# Altium PCB MQ-2_PCB.PcbDoc
Units mm, origin at the board's own origin, x right, y up, seen from the top; angles counter-clockwise.
Board outline 21 x 39.8 mm, 2 copper layers (Top Layer, Bottom Layer), stack 1.571 mm thick; 13 components, 8 nets, 39 pads, 5 vias.
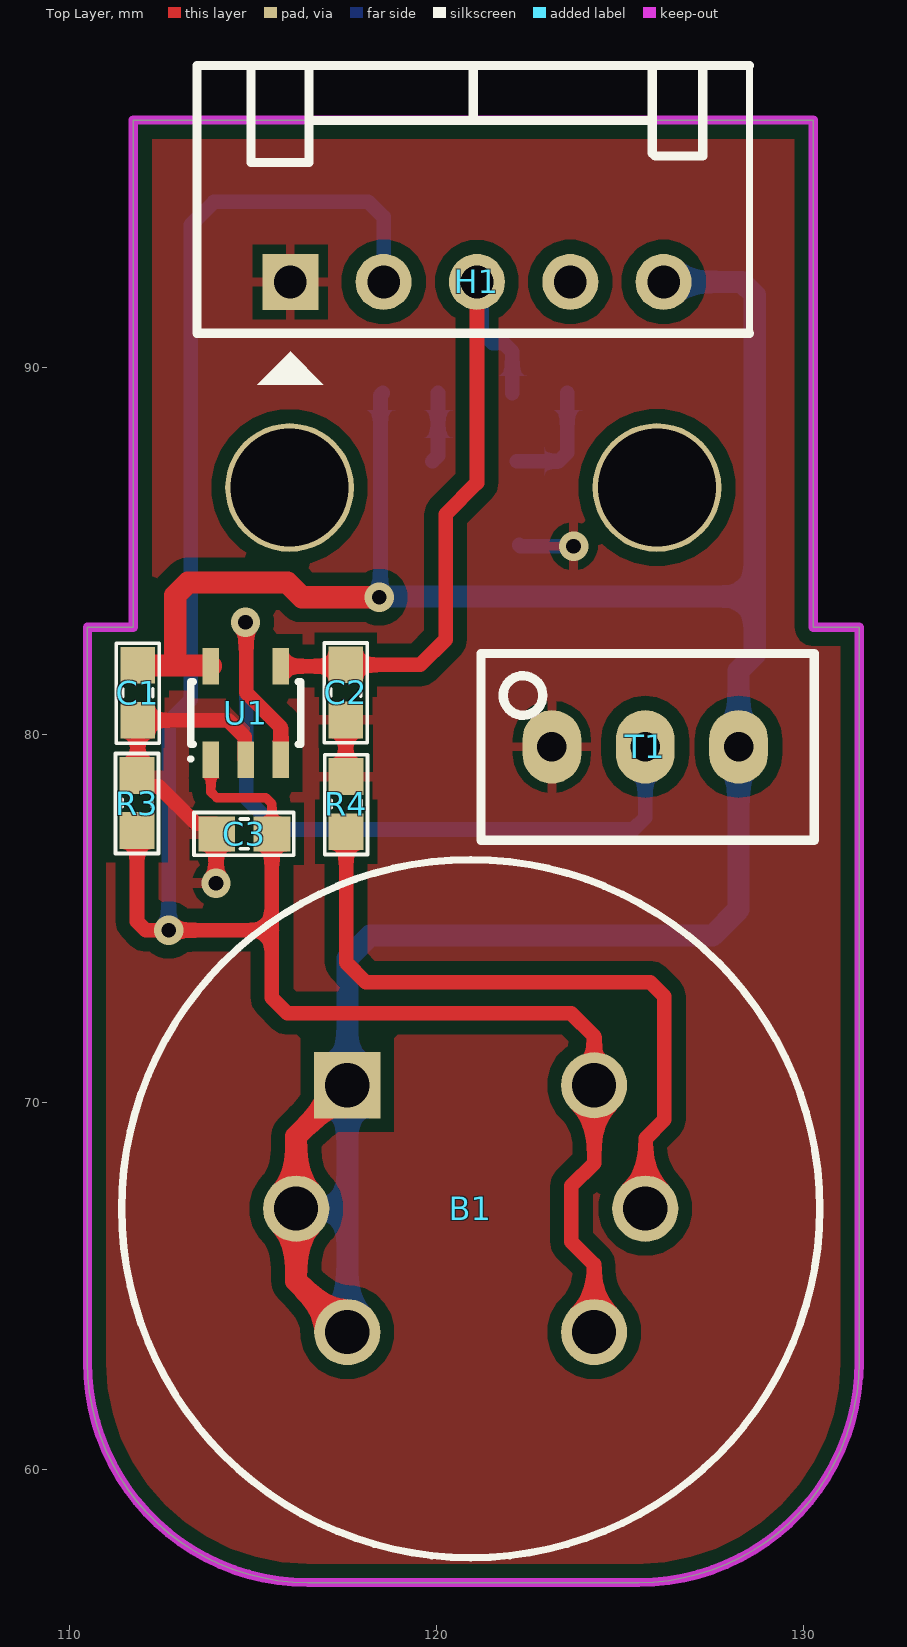
[diagram p0: Top Layer view]
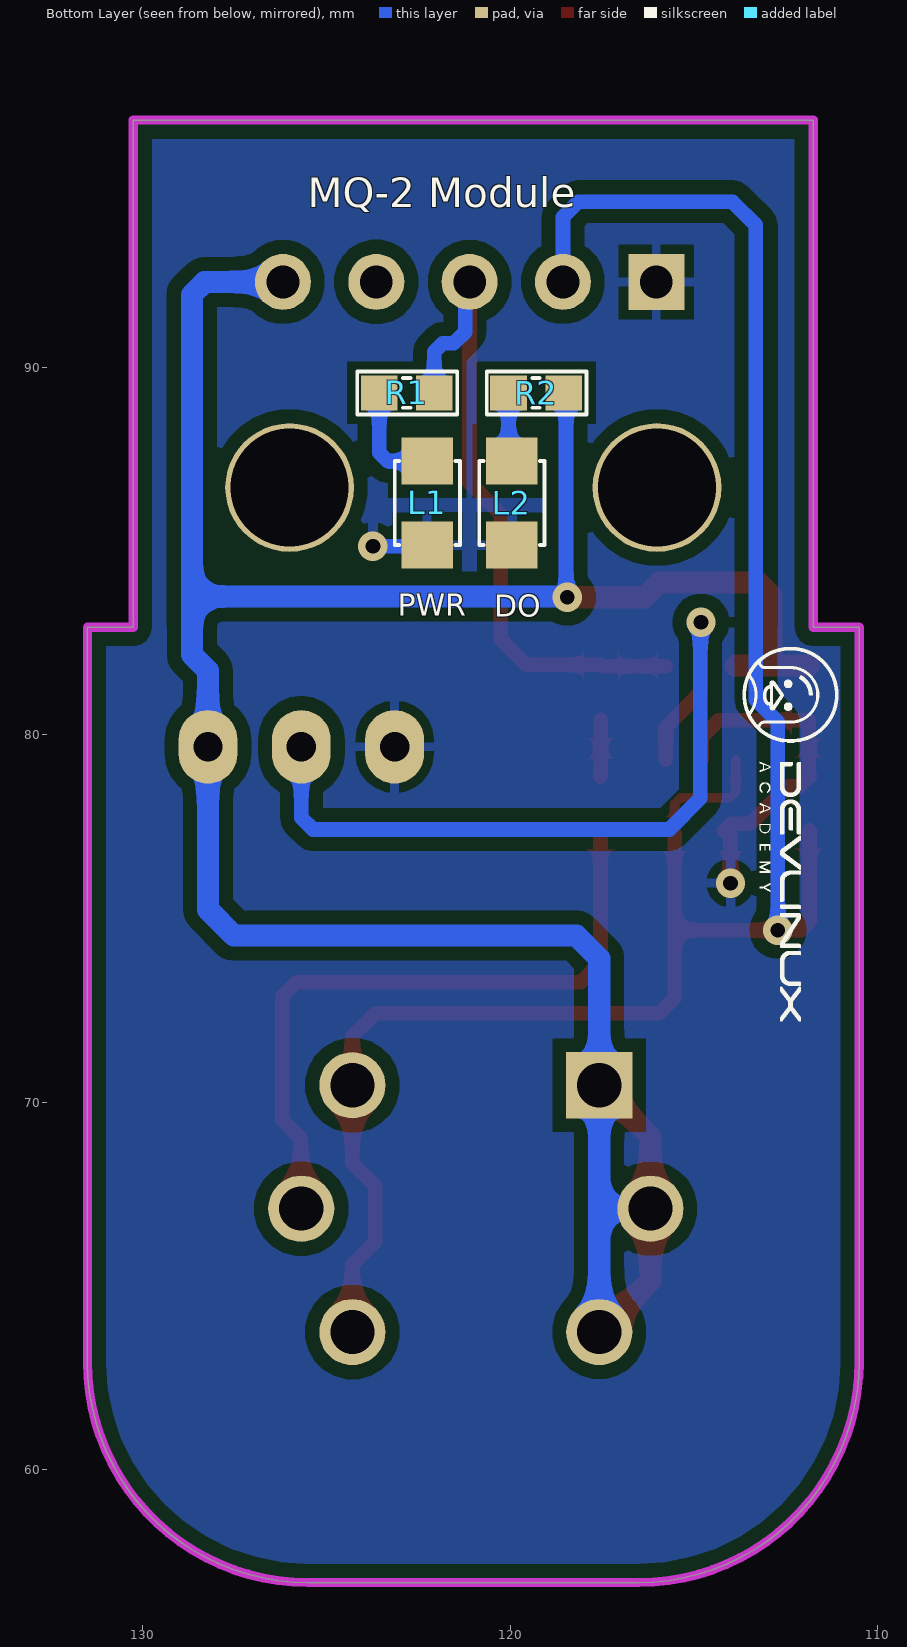
[diagram p1: Bottom Layer view, seen from below]
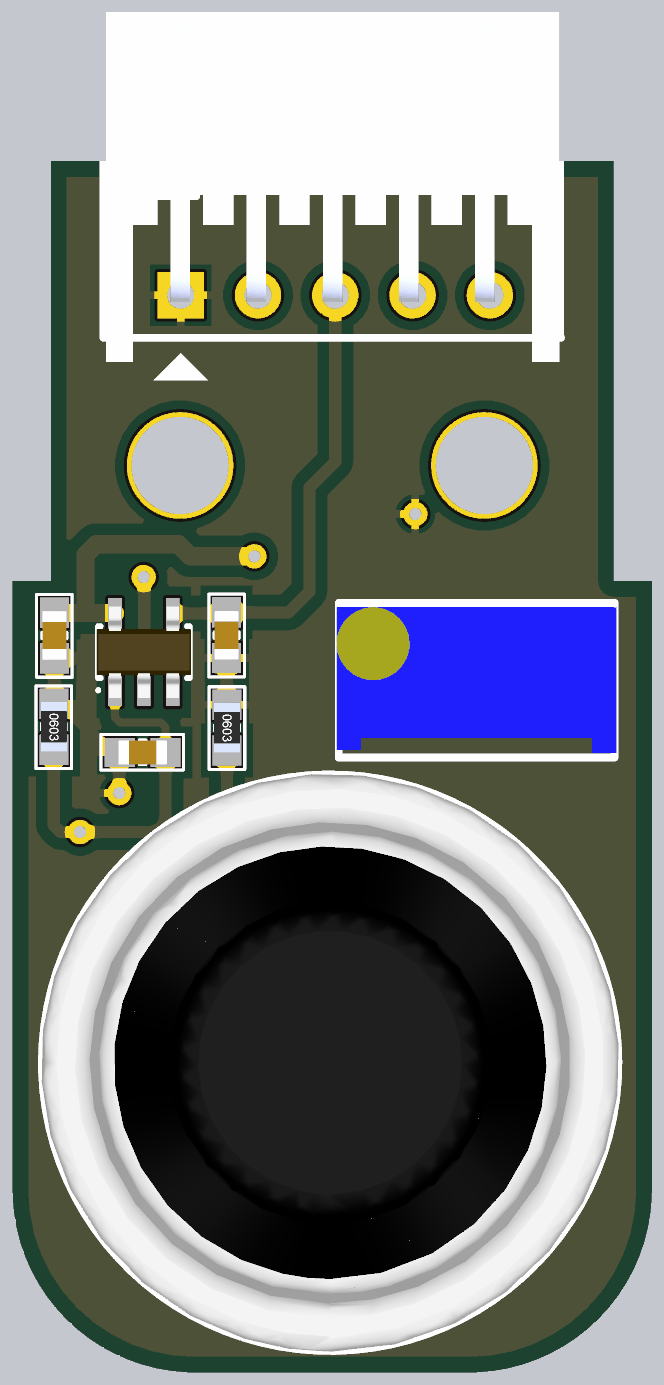
[diagram p2: 3D render of the assembled board from above, using the file's embedded part models]
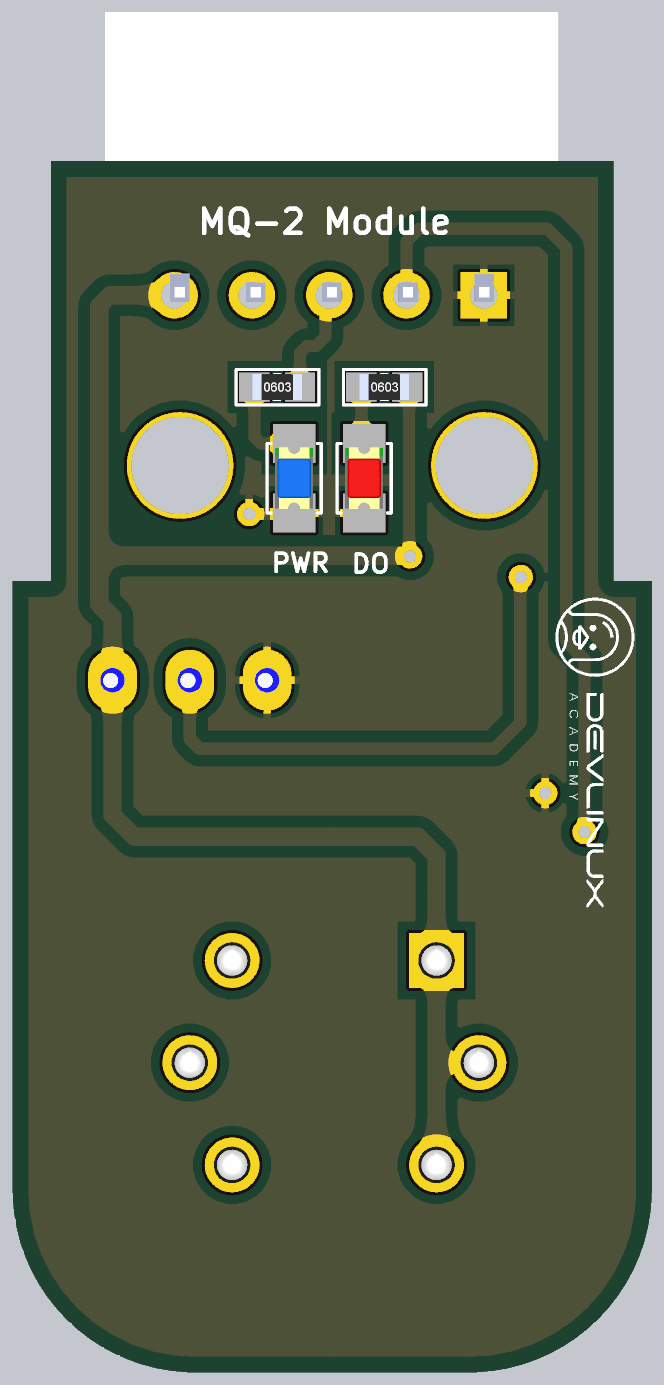
[diagram p3: 3D render of the assembled board from below, using the file's embedded part models]

## Layer stack, top to bottom
Top Solder: solder mask 0.0102, Solder Resist, Dk 3.5
Top Layer: signal copper 0.0356
Dielectric 1: dielectric 1.5, FR-4, Dk 4.8
Bottom Layer: signal copper 0.0356
Bottom Solder: solder mask 0.0102, Solder Resist, Dk 3.5

## Board outline
110.5,62.926 110.5,82.926 111.75,82.926 111.75,96.726 130.25,96.726 130.25,82.926 131.5,82.926 131.5,62.926 cw(c125.5,62.926) 125.5,56.926 116.5,56.926 cw(c116.5,62.926)

## Design rules (kind name [scope] priority, off if disabled: settings)
Clearance [All] p1: gap=0.381 ignorepadtopadclearanceinfootprint=FALSE
PolygonConnect [All] p1: connectstyle=Relief reliefconductorwidth=0.254 reliefentries=4 polygonreliefangle="90 Angle" airgapwidth=0.254
RoomDefinition MQ-2_SCH [InComponentClass('MQ-2_SCH')] p1: confinementstyle=ConfineIn formatcopy=TRUE lockcomponents=FALSE outline 0,0 50.8,0 50.8,25.4 0,25.4
RoutingVias [All] p1: holewidth=0.4 width=0.8 viastyle="Through Hole" minholewidth=0.3 minwidth=0.6 maxholewidth=0.5 maxwidth=1
SolderMaskExpansion [All] p1: expansion=0.102 istentingtop=FALSE
Width [All] p1: maxlimit=0.6 minlimit=0.254 preferedwidth=0.4
30 further rules are at their usual default settings.

## Components (designator, comment, footprint, x,y, rotation, side; value= is the part's Value field where it differs from the comment)
B1 "MQ-2" MQ2 117.572,70.46 r0 top
C1 "100nF" "tu 0603" 111.87,81.14 r270 top
C2 "100nF" "tu 0603" 117.53,81.15 r270 top
C3 "100nF" "tu 0603" 114.77,77.3 r180 top
H1 "Header 5P 2.54 Duc Cong" "Header 5P DC 2.54" 116.02,92.32 r90 top
L1 "LED Blue" LED-0805-Blue 122.25,87.45 r270 bottom
L2 "LED RED" LED-0805-Red 119.95,87.45 r270 bottom
R1 "1k" "tro smd 0603" 122.81,89.3 r180 bottom
R2 "1k" "tro smd 0603" 119.29,89.3 r180 bottom
R3 "47K" "tro smd 0603" 111.85,78.14 r270 top
R4 "5.1R" "tro smd 0603" 117.54,78.11 r270 top
T1 "10K" "Bien Tro Vi Chinh Dung" 125.68,79.67 r0 top
U1 "LM321" sot23-5 114.81,80.59 r90 top

## Footprints (in the part's own frame and the unit in brackets; to place one, negate y for a bottom-side part, rotate by r counter-clockwise, add the part's x,y. Pads: shape width x height; smd on the part's side, far side on the other; paste and mask are expansions set on the pad)
"Bien Tro Vi Chinh Dung" [mm] "Bien tro vi chinh"
  oval 1.6x2 hole 0.8: 1(-2.54,0) 2(0,0) 3(2.54,0)
  silkscreen extent -4.47,-2.54 4.6,2.54, body extent -4.54,-2.4 4.66,2.4, height 12.02
"Header 5P DC 2.54" [mil]
  rect 60x60 hole 35: 1(0,0)
  round 60 hole 35: 2(0,-100) 3(0,-200) 4(0,-300) 5(0,-400)
  silkscreen extent -110,-492 232,100, body extent -87,-490 366,97, height 240
LED-0805-Blue [mil]
  rect 50x55 smd: 1(0,0) 2(90,0)
  silkscreen extent 0,-35 90,35, body extent 5,-25 85,25, height 43
LED-0805-Red [mil]
  rect 50x55 smd: 1(0,0) 2(90,0)
  silkscreen extent 0,-35 90,35, body extent 5,-25 85,25, height 43
MQ2 [mm]
  rect 1.8x1.8 hole 1.2: 1(0,0)
  round 1.8 hole 1.2: 2(-1.391,-3.359) 3(0,-6.718) 4(6.718,-6.718) 5(8.109,-3.359) 6(6.718,0)
  silkscreen extent -6.14,-12.86 12.86,6.14, body extent -6.14,-12.86 12.86,6.14, height 15
sot23-5 [mm]
  rect 1x0.45 smd: 1(-1.275,0.95) 2(-1.275,0) 3(-1.275,-0.95) 4(1.275,-0.95) 5(1.275,0.95)
  silkscreen extent -1.3,-1.5 0.85,1.55, body extent -1.5,-1.55 1.5,1.55, height 1.1
"tro smd 0603" [mm] "Chip Capacitor, 2-Leads, Body 1,60x0,80mm, IPC Medium Density"
  rect 1x0.95 smd mask+0.076: 1(-0.75,0) 2(0.75,0)
  silkscreen extent -1.35,-0.58 1.37,0.58, body extent -0.82,-0.42 0.82,0.43, height 0.44
"tu 0603" [mm] "Chip Capacitor, 2-Leads, Body 1,60x0,80mm, IPC Medium Density"
  rect 1x0.95 smd mask+0.076: 1(-0.75,0) 2(0.75,0)
  silkscreen extent -1.35,-0.58 1.37,0.58, body extent -0.8,-0.4 0.8,0.4, height 0.9

## Part data
B1: "Sensor: gas; smoke,combustible gases; Range: 30010000ppm; MQ-2", Manufacturer_Name=WINSEN, Datasheet Link=https://www.tme.com/Document/9f6250807cbcd9cc73a92775a9c66d2e/MQ-2.pdf, Geometry.Height=15mm, Manufacturer_Part_Number=MQ-2
C1 C2 C3: library part "Tu 0603 104 50V 10%", "Dán", Chung_Loai=Dán, Don_Vi=Con, Ma_Hang=MH004568, So_Chan=2, Ten_Linh_Kien="Tụ 0603 104-100nF 10% 50V"
H1: "Cắm", Chung_Loai=Cắm, Don_Vi=Con, Ma_Hang=MH001308, Ten_Linh_Kien="Header 5P XH2.54-5P Đực Cong"
L1: library part "LED 0805 Xanh Duong", "Dán", Chung_Loai=Dán, Don_Vi=Con, Ma_Hang=MH002327, Ten_Linh_Kien="LED 0805 Màu Xanh Dương (Blue)"
L2: library part "LED 0805 Do", "Dán", Chung_Loai=Dán, Don_Vi=Con, Ma_Hang=MH000897, Ten_Linh_Kien="LED 0805 Màu Đỏ (Red)"
R1 R2: library part "Tro 0603 1% 1k", "Dán", Chung_Loai=Dán, Don_Vi=Con, Ma_Hang=MH006334, So_Chan=2, Ten_Linh_Kien="Trở 0603 1% 1k"
R3 R4: library part "Tro 0603 5% 47k", "Dán", Chung_Loai=Dám, Don_Vi=Con, Ma_Hang=MH007665, So_Chan=2, Ten_Linh_Kien="Trở 0603 5% 47k"
T1: library part "Bien Tro Tinh Chinh 10K Dung", "Cắm", Chung_Loai=Cắm, Don_Vi=Con, Ma_Hang=MH003232, Ten_Linh_Kien="Biến Trở VR 103-10K 3296W"
U1: "Opamp"

## Free pads (board coordinates)
  round 3.5 hole 3.2: 3(116,86.726) 3(126,86.726)

## Via types
v1: diameter 0.8, hole 0.4, Top Layer to Bottom Layer, 5 vias

## Nets (pads, with @x,y where several pads share a name; then routed paths per layer and width w, separated by ;. In a path a pad name is that pad's centre, name@x,y a point inside that pad or via, vN(x,y) a via of type N, cw(c..) or ccw(c..) an arc to the next point about the centre after c; other vN are vias at no path point)
+5: B1.1 B1.2 B1.3 C1.1 H1.5 R2.2 T1.3 U1.5 | length 75.7
  Top Layer w0.6: C1.1 111.883,81.877 112.89,81.877 ; U1.5 113.847,81.877 112.89,81.877 ; B1.3 116.181,65.133 B1.2 116.181,69.069 B1.1 ; v1(118.44,83.74) 116.34,83.74 115.94,84.14 113.241,84.14 112.89,83.789 112.89,81.877
  Bottom Layer w0.4: v1@118.45,83.75 118.46,83.76 118.474,83.774 118.474,89.234 R2.2
  Bottom Layer w0.6: B1.2 117.572,67.101 ; B1.3 117.572,67.101 ; v1(118.44,83.74) v1@118.45,83.75 ; v1@118.46,83.76 128.66,83.76 ; H1.5 128.309,92.32 128.66,91.969 128.66,83.76 ; 117.572,67.101 B1.1 117.572,73.912 118.19,74.53 127.51,74.53 128.22,75.24 T1.3 128.22,81.74 128.66,82.18 128.66,83.76
A_OUT: B1.4 B1.6 C3.1 H1.2 R3.2 U1.1 | length 58.8
  Top Layer w0.254: U1.1 113.86,78.44 114.017,78.283 115.357,78.283 115.52,78.12 C3.1
  Top Layer w0.4: R3.2 111.85,74.914 112.084,74.68 115.52,74.68 ; C3.1 115.52,74.68 ; B1.4 124.29,65.58 123.67,66.2 123.67,67.72 124.29,68.34 B1.6 124.29,71.79 123.66,72.42 115.94,72.42 115.52,72.84 115.52,74.68
  Bottom Layer w0.4: v1(112.71,74.68) 112.71,80.35 113.31,80.95 113.31,93.87 113.946,94.506 118.14,94.506 118.56,94.086 H1.2
D_OUT: C2.1 H1.3 R1.2 U1.4 | length 18.5
  Top Layer w0.4: U1.4 117.495,81.865 C2.1 119.56,81.9 120.25,82.59 120.25,86 121.1,86.85 H1.3
  Bottom Layer w0.4: H1.3 121.222,92.198 121.222,90.958 121.53,90.65 121.826,90.65 122.06,90.416 R1.2
GND: C1.2 C2.2 C3.2 H1.1 L1.2 L2.2 R3.1 R4.1 T1.1 U1.2 | length 12.6
  Top Layer w0.4: v1(114,75.96) 114,77.28 C3.2 ; C3.2@114.177,77.383 113.985,77.575 113.462,77.575 112.447,78.59 112.125,78.59 111.85,78.865 R3.1 111.87,78.91 C1.2 113.232,80.39 113.238,80.396 114.326,80.396 114.785,79.937 114.785,79.34 U1.2 ; C2.2 117.53,78.87 R4.1
  Bottom Layer w0.4: L1.2 122.284,85.13 v1(123.73,85.13)
NetB1_5: B1.5 R4.2 | length 19.1
  Top Layer w0.4: R4.2 117.54,73.8 118.08,73.26 125.82,73.26 126.2,72.88 126.2,69.52 125.691,69.011 B1.5@125.691,66.629
NetL1_1: L1.1 R1.1 | length 3.1
  Bottom Layer w0.4: L1.1@122.19,87.44 123.326,87.44 123.56,87.674 R1.1
NetL2_1: L2.1 R2.1 | length 1.9
  Bottom Layer w0.4: L2.1@119.89,87.44 120.04,87.59 R2.1
NetT1_2: T1.2 U1.3 | length 22.2
  Top Layer w0.4: v1(114.802,83.059) 114.82,83.041 114.82,81.14 115.76,80.2 U1.3
  Bottom Layer w0.4: v1(114.802,83.059) 114.82,83.041 114.82,78.27 115.67,77.42 125.36,77.42 125.68,77.74 T1.2
pads on no net: H1.4

## Polygon pours and split planes (outlines as drawn)
GND on Bottom Layer "NONET_L-01_P-001" (solid, remove dead copper, pour order 3): 109.67,100.79 109.67,56.92 132.09,56.92 132.09,100.79
GND on Bottom Layer "GND_L02_P000" (solid, remove dead copper, pour order 0): 113,100.93 129,100.93 129,82.93 131.5,82.93 131.5,56.92 110.5,56.92 110.5,82.93 113,82.93
GND on Top Layer "NONET_L-01_P-001" (solid, remove dead copper, pour order 2): 109.67,100.79 109.67,56.92 132.09,56.92 132.09,100.79
GND on Top Layer "GND_L01_P001" (solid, remove dead copper, pour order 1): 113,100.93 129,100.93 129,82.93 131.5,82.93 131.5,56.92 110.5,56.92 110.5,82.93 113,82.93

## Keep-outs
Keep-Out Layer:
  the board outline again, w0.254

## Silkscreen, mask and mechanical layers (free items; w line width, h text height)
Bottom Overlay:
  drawing of 21 lines, arcs and shapes, not listed
  text "MQ-2 Module" at 125.5,94.36 h0.8
  text "PWR" at 123.06,83.24 h0.6
  text "DO" at 120.43,83.21 h0.6